# EAGLE board asdf (EAGLE 9.6.2)

Size 160 x 100 mm. Coordinates in mm from the lower left corner, seen from the top.
Outline: 0,0 160,0 160,100 0,100 0,0
Copper layers (1*16): Top 0.035mm / dielectric 1.5mm / Bottom 0.035mm
Design rules "default": minimum track width 6mil, minimum drill 0.35mm, track to track 6mil, track to pad 6mil, pad to pad 6mil, via to via 6mil, smd to smd 6mil, copper to edge 40mil, drill to drill 6mil, minimum pad ring 10mil, minimum via ring 8mil, stop-mask expansion 4mil, vias tented up to drill 0mil, thermal gap 10mil

## Footprints (pad centres in the part's own frame; a part is rotated, then mirrored left to right if it is on the bottom)
P47F-BOTTOM = smd 2.6 x 2.6: A -2.45,0; C 2.45,0 | hole 2.3: 0,0

## Placement (x,y rotation side)
LED1  LAP4-BOTTOM  [P47F-BOTTOM]  5.08,-3.81 0 top  (outside the outline)
LED2  LAP4-BOTTOM  [P47F-BOTTOM]  5.08,-11.43 0 top  (outside the outline)
LED3  LAP4-BOTTOM  [P47F-BOTTOM]  5.08,-19.05 0 top  (outside the outline)
LED4  LAP4-BOTTOM  [P47F-BOTTOM]  5.08,-26.67 0 top  (outside the outline)

## Library data of the parts
LED1-LED4 = led